# EAGLE board PIZ (EAGLE 7.6.0)
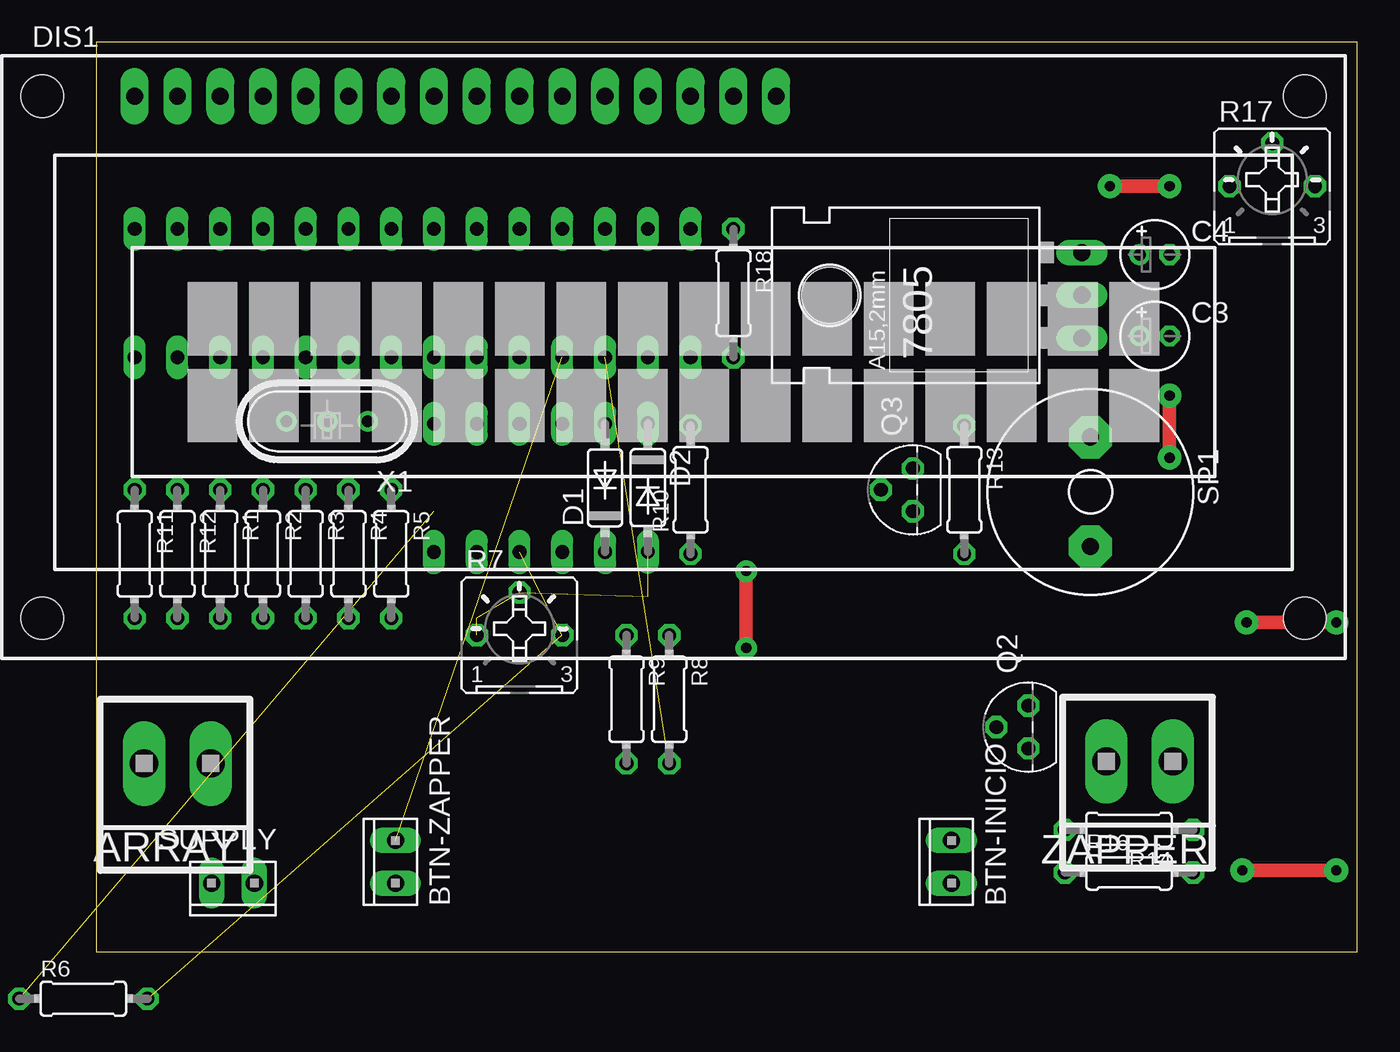
[diagram p0: board, top side]
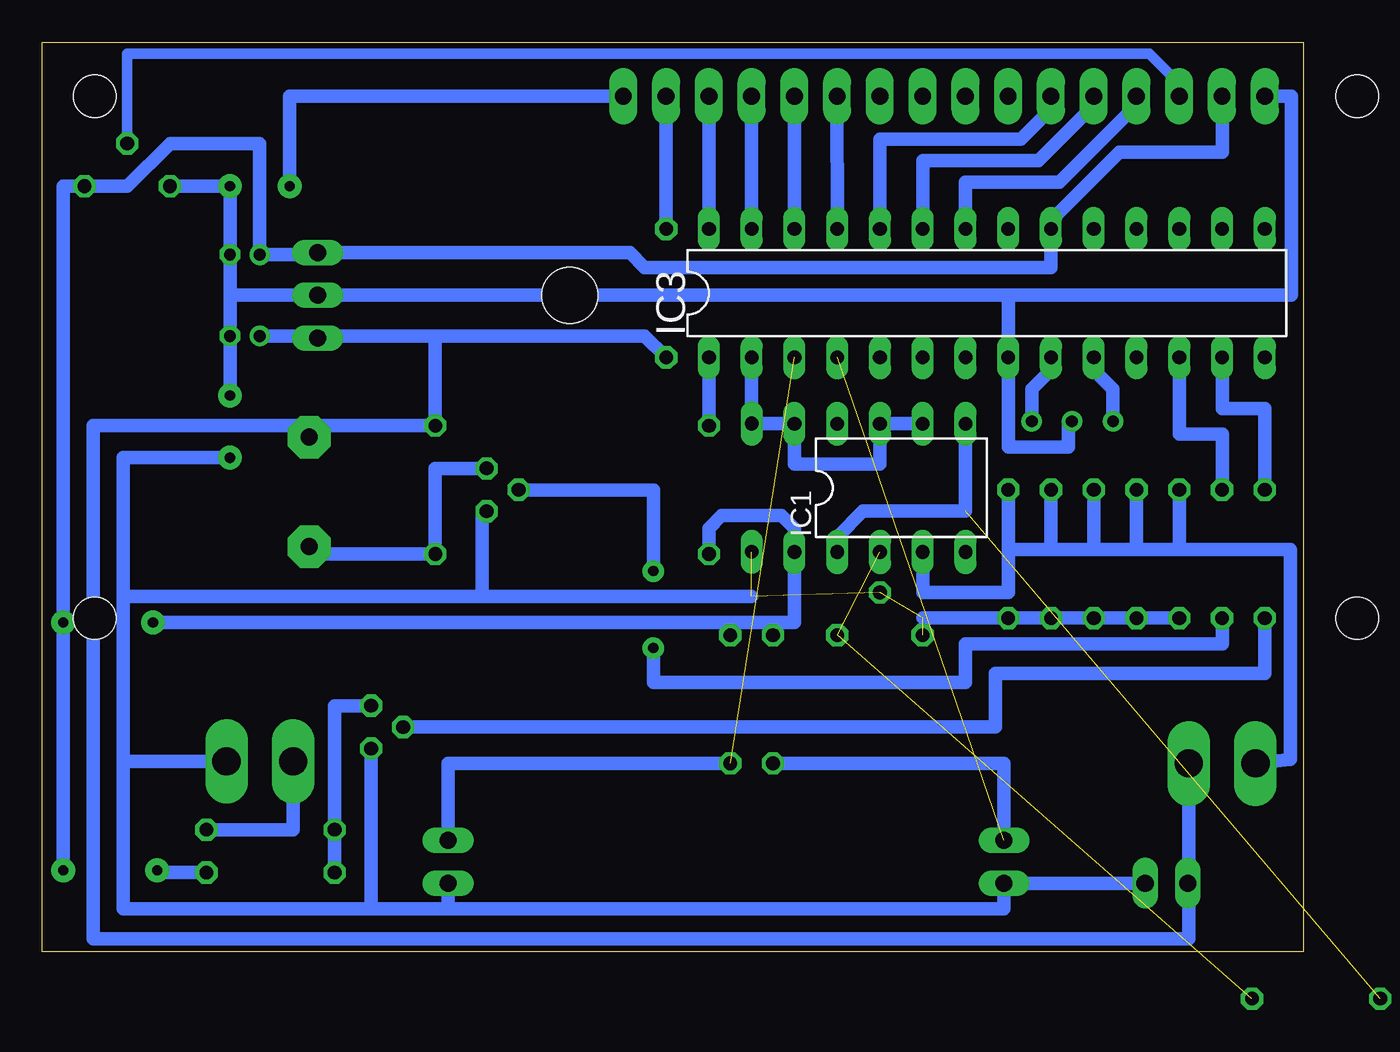
[diagram p1: board, bottom side, seen from below]

Size 74.91 x 54.03 mm. Coordinates in mm from the lower left corner, seen from the top.
Outline: 0,0 74.91,0 74.91,54.03 0,54.03 0,0
Copper layers (1*16): Top 0.035mm / dielectric 1.5mm / Bottom 0.035mm
Design rules "default": minimum track width 10mil, minimum drill 24mil, track to track 8mil, track to pad 8mil, pad to pad 8mil, via to via 8mil, smd to smd 8mil, copper to edge 40mil, drill to drill 8mil, minimum pad ring 10mil, minimum via ring 8mil, stop-mask expansion 4mil, vias tented up to drill 0mil, thermal gap 10mil

## Footprints (pad centres in the part's own frame; a part is rotated, then mirrored left to right if it is on the bottom)
78XXL = drill 1.016 long: GND 0,-3.81; IN -2.54,-3.81; OUT 2.54,-3.81 | hole 3.302: 0,11.176
1X2MTA = drill 1.676 long: 1 1.981,0; 2 -1.981,0
10X02MTA = drill 1.016 long: 1 1.27,0; 2 -1.27,0
E1,8-4 = drill 0.711 pad 1.168: + -0.889,0 | drill 0.711 pad 1.168 octagon: - 0.889,0
DO35-7 = drill 0.813 long: A 3.81,0; C -3.81,0
TUXGR_16X2_R2 = drill 1 pad 1.676 long: 1 -32,15.5; 2 -29.46,15.5; 3 -26.92,15.5; 4 -24.38,15.5; 5 -21.84,15.5; 6 -19.3,15.5; 7 -16.76,15.5; 8 -14.22,15.5; 9 -11.68,15.5; 10 -9.14,15.5; 11 -6.6,15.5; 12 -4.06,15.5; 13 -1.52,15.5; 14 1.02,15.5; 15 3.56,15.5; 16 6.1,15.5 | hole 2.5: -37.5,-15.5; 37.5,-15.5; -37.5,15.5; 37.5,15.5
DIL08 = drill 0.813 pad 1.27 long: 1 -3.81,-3.81; 2 -1.27,-3.81; 3 1.27,-3.81; 4 3.81,-3.81; 5 3.81,3.81; 6 1.27,3.81; 7 -1.27,3.81; 8 -3.81,3.81
DIL28-3 = drill 0.813 long: 1 -16.51,-3.81; 2 -13.97,-3.81; 3 -11.43,-3.81; 4 -8.89,-3.81; 5 -6.35,-3.81; 6 -3.81,-3.81; 7 -1.27,-3.81; 8 1.27,-3.81; 9 3.81,-3.81; 10 6.35,-3.81; 11 8.89,-3.81; 12 11.43,-3.81; 13 13.97,-3.81; 14 16.51,-3.81; 15 16.51,3.81; 16 13.97,3.81; 17 11.43,3.81; 18 8.89,3.81; 19 6.35,3.81; 20 3.81,3.81; 21 1.27,3.81; 22 -1.27,3.81; 23 -3.81,3.81; 24 -6.35,3.81; 25 -8.89,3.81; 26 -11.43,3.81; 27 -13.97,3.81; 28 -16.51,3.81
TO92 = drill 0.813 octagon: 1 1.27,0; 2 0,1.905; 3 -1.27,0
0204/7 = drill 0.813 octagon: 1 -3.81,0; 2 3.81,0
B25P = drill 0.813 octagon: A -2.54,0; E 2.54,0; S 0,2.54
AL60P = drill 1.016 pad 2.54 octagon: 1 -3.251,0; 2 3.251,0
HC49U = drill 0.7 pad 1.2: 1 -2.413,0; 2 -0.027,0; 3 2.413,0

## Placement (x,y rotation side)
7805  [78XXL]  54.74,38.99 90 top
ARRAY  [1X2MTA]  4.83,11.18 180 top
BTN-INICIO  [10X02MTA]  50.8,5.33 90 top
BTN-ZAPPER  [10X02MTA]  17.78,5.33 90 top
C3  10u  [E1,8-4]  62.87,36.58 0 top
C4  10u  [E1,8-4]  62.87,41.4 0 top
D1  1N4148  [DO35-7]  30.23,27.55 90 top
D2  1N4148  [DO35-7]  32.77,27.56 270 top
DIS1  TUXGR_16X2_R2  [TUXGR_16X2_R2]  34.29,35.31 0 top
IC1  LM358N  [DIL08]  23.88,27.55 0 bottom
IC3  PIC16876P  [DIL28-3]  18.8,39.12 0 bottom
Q2  2N3904  [TO92]  55.37,13.34 90 top
Q3  2N3904  [TO92]  48.51,27.43 90 top
R1  1  [0204/7]  7.37,23.62 270 top
R2  1  [0204/7]  9.91,23.62 270 top
R3  1  [0204/7]  12.45,23.62 270 top
R4  1  [0204/7]  14.99,23.62 270 top
R5  1  [0204/7]  17.53,23.62 270 top
R6  10K  [0204/7]  -0.76,-2.79 0 top
R7  5K  [B25P]  25.15,18.8 0 top
R8  10K  [0204/7]  34.04,14.99 270 top
R9  10K  [0204/7]  31.5,14.99 270 top
R10  10K  [0204/7]  35.31,27.43 90 top
R11  1K  [0204/7]  2.29,23.62 270 top
R12  1K  [0204/7]  4.83,23.62 270 top
R13  1K  [0204/7]  51.56,27.43 270 top
R14  20K  [0204/7]  61.34,7.24 180 top
R16  470  [0204/7]  61.34,4.7 0 top
R17  10K  [B25P]  69.85,45.47 0 top
R18  180  [0204/7]  37.85,39.12 270 top
SP1  AL60P  [AL60P]  59.05,27.3 270 top
SUPPLY  [10X02MTA]  8.13,4.06 180 top
X1  4MHz  [HC49U]  13.72,31.5 180 top
ZAPPER  [1X2MTA]  61.98,11.3 180 top

## Library data of the parts
7805 = v-reg
ARRAY BTN-INICIO BTN-ZAPPER SUPPLY ZAPPER = con-amp
C3 C4 R1-R6 R8-R14 R16 R18 = rcl
D1 D2 = diode
DIS1 = display-lcd; OC_FARNELL: unknown; OC_NEWARK: unknown
IC1 = linear
IC3 = microchip; OC_FARNELL: unknown; OC_NEWARK: unknown
Q2 Q3 = transistor-npn
R7 R17 = pot
SP1 = buzzer; OC_FARNELL: unknown; OC_NEWARK: unknown
X1 = crystal; OC_FARNELL: unknown; OC_NEWARK: unknown

## Nets
+5V: 7805.OUT C4.+ D1.C DIS1.2 IC3.20 R8.1 R9.1 R10.1 R16.2 R17.E
GND: 7805.GND BTN-INICIO.2 BTN-ZAPPER.2 C3.- C4.- D2.A DIS1.1 DIS1.16 IC3.8 Q2.3 Q3.3 R1.2 R2.2 R3.2 R4.2 R5.2 R7.A R7.S R17.A SUPPLY.2 X1.2 ZAPPER.2
N$1: ARRAY.1 IC1.3 R1.1 R2.1 R3.1 R4.1 R5.1
N$2: D1.A D2.C IC1.6 IC1.7 IC3.2
N$4: IC1.1 IC1.5 R6.1
N$5: IC1.2 R6.2 R7.E
N$6: IC3.1 R10.2
N$7: IC3.10 X1.3
N$8: BTN-INICIO.1 IC3.3 R8.2
N$10: IC3.12 R12.1
N$11: BTN-ZAPPER.1 IC3.4 R9.2
N$13: Q2.2 R11.2
N$14: Q3.2 R12.2
N$15: Q3.1 R13.2 SP1.2
N$18: R14.1 ZAPPER.1
N$19: Q2.1 R14.2 R16.1
N$20: DIS1.14 IC3.28
N$21: DIS1.13 IC3.27
N$22: DIS1.12 IC3.26
N$23: DIS1.11 IC3.25
N$24: DIS1.6 IC3.24
N$25: DIS1.5 IC3.23
N$26: DIS1.4 IC3.22
N$27: DIS1.15 R18.1
N$28: DIS1.3 R17.S
N$29: IC3.13 R11.1
N$30: IC3.9 X1.1
V+: IC1.8
V-: IC1.4
VCC: 7805.IN ARRAY.2 C3.+ R13.1 R18.2 SP1.1 SUPPLY.1
VSS: IC3.19

## Tracks (layer width: path | path; a pad name or v marks a point on that pad's centre or on a via)
+5V  (via drill 0.6 pad 1.42)
  Top 0.813: v68.07,4.83 v73.66,4.83 | v68.33,19.56 v73.66,19.56
  Bottom 0.813: R10.1 35.31,25.15 34.54,25.91 30.99,25.91 30.23,25.15 D1.C 30.23,19.56 31.5,19.56 | DIS1.2 4.83,47.5 10.92,47.5 14.99,43.43 IC3.20 14.99,40.64 39.12,40.64 40.01,41.53 7805.OUT 58.67,41.4 C4.+ 61.98,48.01 67.31,48.01 69.85,45.47 R17.E 73.66,45.47 v73.66,19.56 v73.66,4.83 | R9.1 31.5,19.56 | R16.2 68.07,4.7 v68.07,4.83 | 31.5,19.56 34.29,19.56 | 34.29,19.56 v68.33,19.56 | R8.1 34.29,18.8 34.29,19.56
GND  (via drill 0.6 pad 1.42)  (4 unrouted)
  Top 0.813: v63.75,45.47 v60.2,45.47 | v63.75,29.34 v63.75,33.02
  Bottom 0.813: 63.75,38.99 C4.- v63.75,45.47 R17.A | 63.75,38.99 C3.- v63.75,33.02 | 63.75,38.99 7805.GND 17.65,38.99 17.53,38.86 | X1.2 13.97,31.5 13.97,29.97 17.53,29.97 IC3.8 17.53,38.86 | R1.2 R2.2 R3.2 R4.2 R5.2 22.61,19.81 | 17.53,38.86 17.53,38.99 0.71,38.99 0.71,50.81 DIS1.1 | DIS1.16 60.2,50.8 v60.2,45.47 | v63.75,29.34 70.1,29.34 70.1,21.08 | 70.1,21.08 70.1,11.3 | 70.1,11.3 70.1,2.54 55.37,2.54 | 55.37,2.54 50.8,2.54 | 50.8,2.54 17.78,2.54 BTN-ZAPPER.2 SUPPLY.2 | BTN-INICIO.2 50.8,2.54 | ZAPPER.2 70.1,11.3 | 32.77,21.08 48.77,21.08 | 48.77,21.08 70.1,21.08 | Q3.3 48.77,26.16 48.77,21.08 | Q2.3 55.37,2.54
N$1
  Bottom 0.813: ARRAY.1 0.76,11.43 0.76,23.88 7.37,23.88 | IC1.3 22.61,21.34 17.53,21.34 17.53,23.88 | 17.53,23.88 14.99,23.88 | 14.99,23.88 12.45,23.88 | 12.45,23.88 9.91,23.88 | 9.91,23.88 7.37,23.88 | R5.1 17.53,23.88 | R4.1 14.99,23.88 | R3.1 12.45,23.88 | R2.1 9.91,23.88 | R1.1 7.37,23.88
N$2
  Bottom 0.61: IC1.7 25.15,32
  Bottom 0.813: IC1.6 IC1.7 25.15,28.96 30.23,28.96 D1.A 32.75,31.36 D2.C IC3.2
N$4  (1 unrouted)
  Bottom 0.813: IC1.5 20.07,26.16 26.16,26.16 27.69,24.64 IC1.1
N$5  (2 unrouted)
N$6
  Bottom 0.813: IC3.1 R10.2
N$7
  Bottom 0.813: X1.3 11.3,33.4 12.45,34.54 IC3.10
N$8  (1 unrouted)
  Bottom 0.813: R8.2 50.8,11.18 BTN-INICIO.1
N$10
  Bottom 0.813: R12.1 4.83,30.73 7.37,30.73 IC3.12
N$11  (1 unrouted)
  Bottom 0.813: R9.2 17.78,11.18 BTN-ZAPPER.1
N$13
  Bottom 0.813: R11.2 2.29,16.51 18.29,16.51 18.29,13.34 Q2.2
N$14  (via drill 0.6 pad 1.27)
  Top 0.813: v38.61,18.03 v38.61,22.61
  Bottom 0.813: R12.2 4.83,18.29 20.07,18.29 20.07,16 38.61,16 v38.61,18.03 | v38.61,22.61 38.61,27.43 Q3.2
N$15
  Bottom 0.813: Q3.1 51.56,28.7 R13.2 59.05,23.62 SP1.2
N$18
  Bottom 0.813: R14.1 59.99,7.24 ZAPPER.1
N$19
  Bottom 0.813: Q2.1 57.53,14.61 R14.2 R16.1
N$20
  Bottom 0.813: IC3.28 DIS1.14
N$21
  Bottom 0.813: IC3.27 DIS1.13
N$22
  Bottom 0.813: IC3.26 DIS1.12
N$23
  Bottom 0.813: IC3.25 DIS1.11
N$24
  Bottom 0.813: IC3.24 25.15,48.26 16.76,48.26 14.99,50.03 DIS1.6
N$25
  Bottom 0.813: IC3.23 22.61,46.99 15.75,46.99 12.45,50.29 DIS1.5
N$26
  Bottom 0.813: IC3.22 20.07,45.72 14.48,45.72 9.91,50.29 DIS1.4
N$27
  Bottom 0.813: R18.1 DIS1.15
N$28
  Bottom 0.61: R17.S 69.85,53.34 9.14,53.34 7.37,51.57 DIS1.3
N$29
  Bottom 0.813: R11.1 2.29,32.26 4.83,32.26 IC3.13
N$30
  Bottom 0.813: X1.1 16.13,33.4 14.99,34.54 IC3.9
VCC
  Bottom 0.813: 7805.IN 58.67,36.58 C3.+ 51.56,36.58 | 59.05,31.24 R13.1 51.56,36.58 | 59.05,31.24 SP1.1 | R18.2 39.12,36.58 51.56,36.58 | ARRAY.2 6.81,4.06 | 59.05,31.24 71.88,31.24 71.88,0.76 6.81,0.76 6.81,3.56 6.81,4.06 | SUPPLY.1 6.81,4.06